# Altium PCB STM32F302VC_EVM.PcbDoc (part 14 of 19)
Units mil, origin at the board's own origin, x right, y up, seen from the top; angles counter-clockwise.
Board outline 3937.01 x 3937.01 mil, 2 copper layers (Top Layer, Bottom Layer); 117 components, 166 nets, 602 pads, 373 vias.
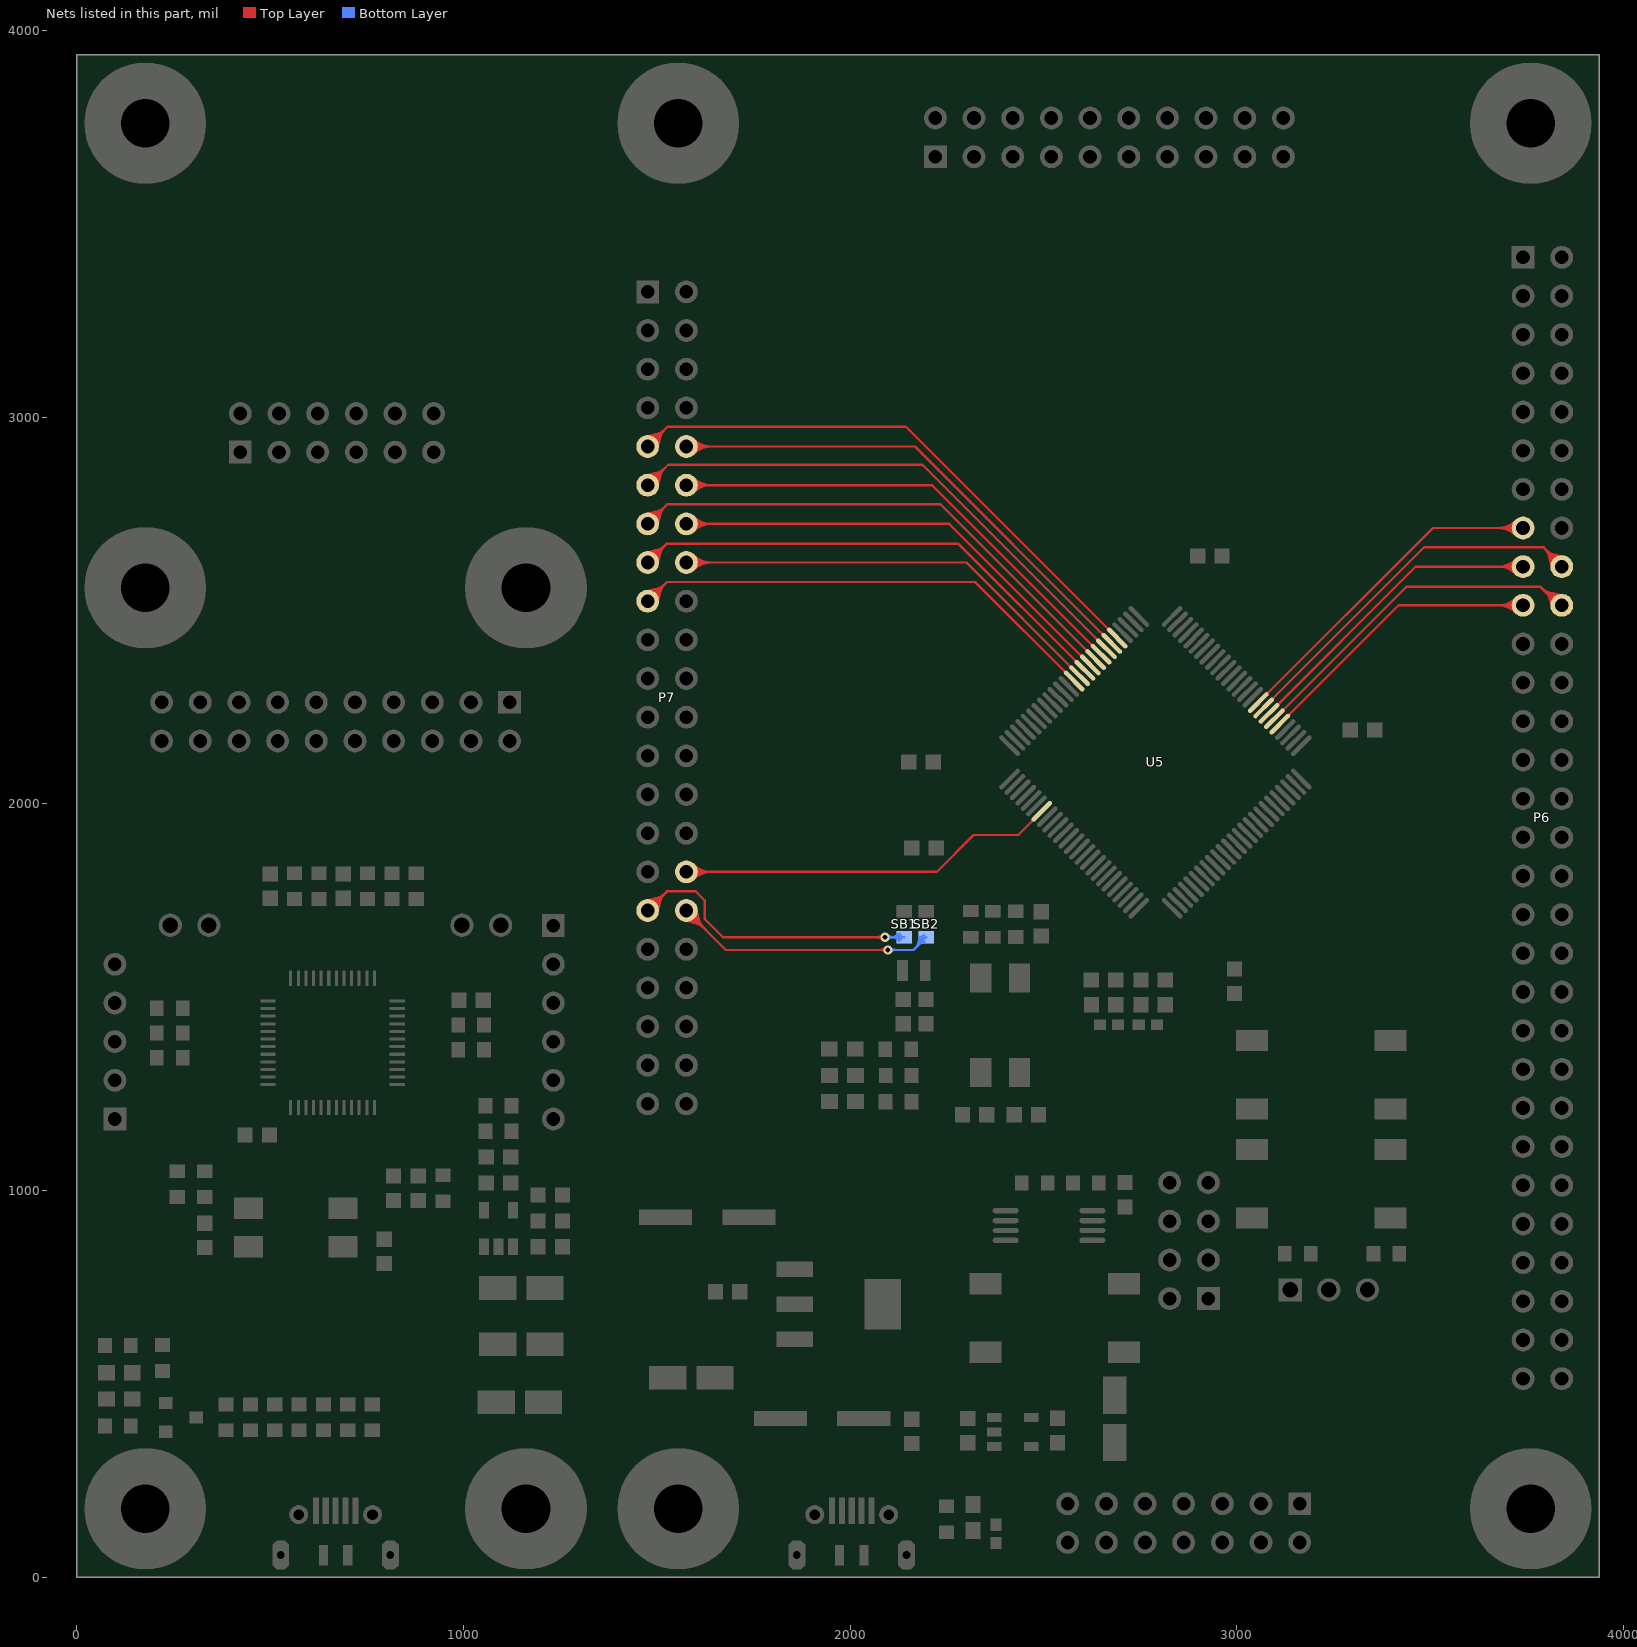
[diagram p14: the nets of this part, all layers, seen from the top]

## Via types
v1: diameter 23.62, hole 11.81, Top Layer to Bottom Layer, tented both sides, 372 vias
v2: diameter 50, hole 28, Top Layer to Bottom Layer, tented both sides, 1 vias

## Nets (pads, with @x,y where several pads share a name; then routed paths per layer and width w, separated by ;. In a path a pad name is that pad's centre, name@x,y a point inside that pad or via, vN(x,y) a via of type N, cw(c..) or ccw(c..) an arc to the next point about the centre after c; other vN are vias at no path point) (continued)
PC12: P7.9 U5.80 | length 3401.5
  Top Layer w6: P7.9@1476.38,2924.02 1527.76,2975.39 2143.97,2975.39 U5.80@2690.54,2428.82 ; P7.9@1461.22,2927.12 cw(c1494.37,2920.33) 1485.61,2953.02 ; P7.9@1461.22,2927.12 cw(c1494.37,2920.33) 1485.61,2953.02 ; P7.9@1461.22,2927.12 cw(c1494.37,2920.33) 1485.61,2953.02 ; P7.9@1467.1,2925.92 cw(c1505.01,2918.15) 1494.99,2955.53 ; P7.9@1467.1,2925.92 cw(c1505.01,2918.15) 1494.99,2955.53 ; P7.9@1467.1,2925.92 cw(c1505.01,2918.15) 1494.99,2955.53 ; P7.9@1472.92,2924.27 cw(c1500.72,2922.2) 1493.5,2949.13 ; P7.9@1472.92,2924.27 cw(c1500.72,2922.2) 1493.5,2949.13 ; P7.9@1472.92,2924.27 cw(c1500.72,2922.2) 1493.5,2949.13 ; P7.9@1472.98,2924.71 cw(c1515.64,2915.98) 1504.37,2958.04 ; P7.9@1472.98,2924.71 cw(c1515.64,2915.98) 1504.37,2958.04 ; P7.9@1472.98,2924.71 cw(c1515.64,2915.98) 1504.37,2958.04 ; P7.9@1476.19,2926.54 ccw(c1473.9,2957.29) 1503.68,2949.31 ; P7.9@1476.19,2926.54 ccw(c1473.9,2957.29) 1503.68,2949.31 ; P7.9@1476.19,2926.54 ccw(c1473.9,2957.29) 1503.68,2949.31 ; P7.9@1476.38,2938.54 ccw(c1476.38,2973.62) 1501.18,2948.82 ; P7.9@1476.38,2938.54 ccw(c1476.38,2973.62) 1501.18,2948.82 ; P7.9@1476.38,2938.54 ccw(c1476.38,2973.62) 1501.18,2948.82 ; P7.9@1476.38,2944.54 ccw(c1476.38,2994.1) 1511.42,2959.06 ; P7.9@1476.38,2944.54 ccw(c1476.38,2994.1) 1511.42,2959.06 ; P7.9@1476.38,2944.54 ccw(c1476.38,2994.1) 1511.42,2959.06 ; P7.9@1476.38,2950.54 ccw(c1476.38,3014.59) 1521.66,2969.3 ; P7.9@1476.38,2950.54 ccw(c1476.38,3014.59) 1521.66,2969.3 ; P7.9@1476.38,2950.54 ccw(c1476.38,3014.59) 1521.66,2969.3 ; P7.9@1476.64,2920.55 ccw(c1474.56,2948.36) 1501.49,2941.14 ; P7.9@1476.64,2920.55 ccw(c1474.56,2948.36) 1501.49,2941.14 ; P7.9@1476.64,2920.55 ccw(c1474.56,2948.36) 1501.49,2941.14 ; P7.9@1477.07,2920.61 ccw(c1468.34,2963.28) 1510.41,2952.01 ; P7.9@1477.07,2920.61 ccw(c1468.34,2963.28) 1510.41,2952.01 ; P7.9@1477.07,2920.61 ccw(c1468.34,2963.28) 1510.41,2952.01 ; P7.9@1478.28,2914.74 ccw(c1470.52,2952.65) 1507.89,2942.63 ; P7.9@1478.28,2914.74 ccw(c1470.52,2952.65) 1507.89,2942.63 ; P7.9@1478.28,2914.74 ccw(c1470.52,2952.65) 1507.89,2942.63 ; P7.9@1478.9,2923.83 cw(c1509.65,2921.53) 1501.67,2951.32 ; P7.9@1478.9,2923.83 cw(c1509.65,2921.53) 1501.67,2951.32 ; P7.9@1478.9,2923.83 cw(c1509.65,2921.53) 1501.67,2951.32 ; P7.9@1479.48,2908.86 ccw(c1472.69,2942.01) 1505.38,2933.25 ; P7.9@1479.48,2908.86 ccw(c1472.69,2942.01) 1505.38,2933.25 ; P7.9@1479.48,2908.86 ccw(c1472.69,2942.01) 1505.38,2933.25 ; P7.9@1490.91,2924.02 cw(c1525.98,2924.02) 1501.18,2948.82 ; P7.9@1490.91,2924.02 cw(c1525.98,2924.02) 1501.18,2948.82 ; P7.9@1490.91,2924.02 cw(c1525.98,2924.02) 1501.18,2948.82 ; P7.9@1496.91,2924.02 cw(c1546.46,2924.02) 1511.42,2959.06 ; P7.9@1496.91,2924.02 cw(c1546.46,2924.02) 1511.42,2959.06 ; P7.9@1496.91,2924.02 cw(c1546.46,2924.02) 1511.42,2959.06 ; P7.9@1502.91,2924.02 cw(c1566.95,2924.02) 1521.66,2969.3 ; P7.9@1502.91,2924.02 cw(c1566.95,2924.02) 1521.66,2969.3 ; P7.9@1502.91,2924.02 cw(c1566.95,2924.02) 1521.66,2969.3 ; 2664.7,2454.66 cw(c2659.74,2449.7) U5.80@2666.76,2449.7 ; 2664.7,2454.66 ccw(c2669.66,2459.62) U5.80@2669.66,2452.61 ; 2664.7,2454.66 ccw(c2669.66,2459.62) U5.80@2669.66,2452.61 ; 2664.7,2454.66 cw(c2659.74,2449.7) U5.80@2666.76,2449.7 ; 2664.7,2454.66 ccw(c2669.66,2459.62) U5.80@2669.66,2452.61 ; 2664.7,2454.66 cw(c2659.74,2449.7) U5.80@2666.76,2449.7
PC13: P7.32 U5.7 | length 1717.8
  Top Layer w6: P7.32@1576.38,1824.02 2223.81,1824.02 2319.09,1919.29 2434.34,1919.29 U5.7@2495.67,1980.62 ; P7.32@1586.65,1813.74 cw(c1611.45,1788.94) 1611.45,1824.02 ; P7.32@1586.65,1813.74 cw(c1611.45,1788.94) 1611.45,1824.02 ; P7.32@1586.65,1813.74 cw(c1611.45,1788.94) 1611.45,1824.02 ; P7.32@1586.65,1834.29 ccw(c1611.45,1859.09) 1611.45,1824.02 ; P7.32@1586.65,1834.29 ccw(c1611.45,1859.09) 1611.45,1824.02 ; P7.32@1586.65,1834.29 ccw(c1611.45,1859.09) 1611.45,1824.02 ; P7.32@1590.89,1809.5 cw(c1625.93,1774.46) 1625.93,1824.02 ; P7.32@1590.89,1809.5 cw(c1625.93,1774.46) 1625.93,1824.02 ; P7.32@1590.89,1809.5 cw(c1625.93,1774.46) 1625.93,1824.02 ; P7.32@1590.89,1838.53 ccw(c1625.94,1873.57) 1625.94,1824.02 ; P7.32@1590.89,1838.53 ccw(c1625.94,1873.57) 1625.94,1824.02 ; P7.32@1590.89,1838.53 ccw(c1625.94,1873.57) 1625.94,1824.02 ; P7.32@1595.14,1805.26 cw(c1640.42,1759.97) 1640.42,1824.02 ; P7.32@1595.14,1805.26 cw(c1640.42,1759.97) 1640.42,1824.02 ; P7.32@1595.14,1805.26 cw(c1640.42,1759.97) 1640.42,1824.02 ; P7.32@1595.14,1842.77 ccw(c1640.42,1888.06) 1640.42,1824.02 ; P7.32@1595.14,1842.77 ccw(c1640.42,1888.06) 1640.42,1824.02 ; P7.32@1595.14,1842.77 ccw(c1640.42,1888.06) 1640.42,1824.02 ; 2469.83,1954.78 cw(c2474.79,1949.82) U5.7@2474.79,1956.83 ; 2469.83,1954.78 ccw(c2464.87,1959.74) U5.7@2471.89,1959.74 ; 2469.83,1954.78 ccw(c2464.87,1959.74) U5.7@2471.89,1959.74 ; 2469.83,1954.78 cw(c2474.79,1949.82) U5.7@2474.79,1956.83 ; 2469.83,1954.78 ccw(c2464.87,1959.74) U5.7@2471.89,1959.74 ; 2469.83,1954.78 cw(c2474.79,1949.82) U5.7@2474.79,1956.83
PC14: P7.33 SB1.1 | length 3095.8
  Top Layer w6: P7.33@1476.38,1724.02 1525.98,1773.62 1600.69,1773.62 1624.02,1750.3 1624.02,1702.19 1671.12,1655.09 v1(2089.99,1655.09) ; P7.33@1461.22,1727.12 cw(c1494.37,1720.33) 1485.61,1753.02 ; P7.33@1461.22,1727.12 cw(c1494.37,1720.33) 1485.61,1753.02 ; P7.33@1461.22,1727.12 cw(c1494.37,1720.33) 1485.61,1753.02 ; P7.33@1467.1,1725.92 cw(c1505.01,1718.15) 1494.99,1755.53 ; P7.33@1467.1,1725.92 cw(c1505.01,1718.15) 1494.99,1755.53 ; P7.33@1467.1,1725.92 cw(c1505.01,1718.15) 1494.99,1755.53 ; P7.33@1472.92,1724.27 cw(c1500.72,1722.2) 1493.5,1749.13 ; P7.33@1472.92,1724.27 cw(c1500.72,1722.2) 1493.5,1749.13 ; P7.33@1472.92,1724.27 cw(c1500.72,1722.2) 1493.5,1749.13 ; P7.33@1472.98,1724.71 cw(c1515.64,1715.98) 1504.37,1758.04 ; P7.33@1472.98,1724.71 cw(c1515.64,1715.98) 1504.37,1758.04 ; P7.33@1472.98,1724.71 cw(c1515.64,1715.98) 1504.37,1758.04 ; P7.33@1476.19,1726.54 ccw(c1473.9,1757.29) 1503.68,1749.31 ; P7.33@1476.19,1726.54 ccw(c1473.9,1757.29) 1503.68,1749.31 ; P7.33@1476.19,1726.54 ccw(c1473.9,1757.29) 1503.68,1749.31 ; P7.33@1476.38,1738.54 ccw(c1476.38,1773.62) 1501.18,1748.82 ; P7.33@1476.38,1738.54 ccw(c1476.38,1773.62) 1501.18,1748.82 ; P7.33@1476.38,1738.54 ccw(c1476.38,1773.62) 1501.18,1748.82 ; P7.33@1476.38,1744.54 ccw(c1476.38,1794.1) 1511.42,1759.06 ; P7.33@1476.38,1744.54 ccw(c1476.38,1794.1) 1511.42,1759.06 ; P7.33@1476.38,1744.54 ccw(c1476.38,1794.1) 1511.42,1759.06 ; P7.33@1476.38,1750.54 ccw(c1476.38,1814.59) 1521.66,1769.3 ; P7.33@1476.38,1750.54 ccw(c1476.38,1814.59) 1521.66,1769.3 ; P7.33@1476.38,1750.54 ccw(c1476.38,1814.59) 1521.66,1769.3 ; P7.33@1476.64,1720.55 ccw(c1474.56,1748.36) 1501.49,1741.14 ; P7.33@1476.64,1720.55 ccw(c1474.56,1748.36) 1501.49,1741.14 ; P7.33@1476.64,1720.55 ccw(c1474.56,1748.36) 1501.49,1741.14 ; P7.33@1477.07,1720.61 ccw(c1468.34,1763.28) 1510.41,1752.01 ; P7.33@1477.07,1720.61 ccw(c1468.34,1763.28) 1510.41,1752.01 ; P7.33@1477.07,1720.61 ccw(c1468.34,1763.28) 1510.41,1752.01 ; P7.33@1478.28,1714.74 ccw(c1470.52,1752.65) 1507.89,1742.63 ; P7.33@1478.28,1714.74 ccw(c1470.52,1752.65) 1507.89,1742.63 ; P7.33@1478.28,1714.74 ccw(c1470.52,1752.65) 1507.89,1742.63 ; P7.33@1478.9,1723.83 cw(c1509.65,1721.53) 1501.67,1751.32 ; P7.33@1478.9,1723.83 cw(c1509.65,1721.53) 1501.67,1751.32 ; P7.33@1478.9,1723.83 cw(c1509.65,1721.53) 1501.67,1751.32 ; P7.33@1479.48,1708.86 ccw(c1472.69,1742.01) 1505.38,1733.25 ; P7.33@1479.48,1708.86 ccw(c1472.69,1742.01) 1505.38,1733.25 ; P7.33@1479.48,1708.86 ccw(c1472.69,1742.01) 1505.38,1733.25 ; P7.33@1490.91,1724.02 cw(c1525.98,1724.02) 1501.18,1748.82 ; P7.33@1490.91,1724.02 cw(c1525.98,1724.02) 1501.18,1748.82 ; P7.33@1490.91,1724.02 cw(c1525.98,1724.02) 1501.18,1748.82 ; P7.33@1496.91,1724.02 cw(c1546.46,1724.02) 1511.42,1759.06 ; P7.33@1496.91,1724.02 cw(c1546.46,1724.02) 1511.42,1759.06 ; P7.33@1496.91,1724.02 cw(c1546.46,1724.02) 1511.42,1759.06 ; P7.33@1502.91,1724.02 cw(c1566.95,1724.02) 1521.66,1769.3 ; P7.33@1502.91,1724.02 cw(c1566.95,1724.02) 1521.66,1769.3 ; P7.33@1502.91,1724.02 cw(c1566.95,1724.02) 1521.66,1769.3 ; 2068.72,1655.09 cw(c2068.72,1633.82) v1@2083.76,1648.86 ; 2068.72,1655.09 ccw(c2068.72,1676.36) v1@2083.76,1661.32 ; 2068.72,1655.09 ccw(c2068.72,1676.36) v1@2083.76,1661.32 ; 2068.72,1655.09 cw(c2068.72,1633.82) v1@2083.76,1648.86 ; 2068.72,1655.09 ccw(c2068.72,1676.36) v1@2083.76,1661.32 ; 2068.72,1655.09 cw(c2068.72,1633.82) v1@2083.76,1648.86
  Bottom Layer w6: v1(2089.99,1655.09) SB1.1@2139.76,1655.09 ; v1@2096.22,1648.86 cw(c2111.26,1633.82) 2111.26,1655.09 ; v1@2096.22,1648.86 cw(c2111.26,1633.82) 2111.26,1655.09 ; v1@2096.22,1648.86 cw(c2111.26,1633.82) 2111.26,1655.09 ; v1@2096.22,1661.32 ccw(c2111.26,1676.36) 2111.26,1655.09 ; v1@2096.22,1661.32 ccw(c2111.26,1676.36) 2111.26,1655.09 ; v1@2096.22,1661.32 ccw(c2111.26,1676.36) 2111.26,1655.09 ; 2104.38,1655.09 cw(c2104.38,1623.7) SB1.1@2126.57,1645.9 ; 2104.38,1655.09 ccw(c2104.38,1686.47) SB1.1@2126.57,1664.28 ; 2104.38,1655.09 ccw(c2104.38,1686.47) SB1.1@2126.57,1664.28 ; 2104.38,1655.09 cw(c2104.38,1623.7) SB1.1@2126.57,1645.9 ; 2104.38,1655.09 ccw(c2104.38,1686.47) SB1.1@2126.57,1664.28 ; 2104.38,1655.09 cw(c2104.38,1623.7) SB1.1@2126.57,1645.9 ; 2118.86,1655.09 cw(c2118.86,1638.19) SB1.1@2130.81,1650.14 ; 2118.86,1655.09 ccw(c2118.86,1671.99) SB1.1@2130.81,1660.04 ; 2118.86,1655.09 ccw(c2118.86,1671.99) SB1.1@2130.81,1660.04 ; 2118.86,1655.09 cw(c2118.86,1638.19) SB1.1@2130.81,1650.14 ; 2118.86,1655.09 ccw(c2118.86,1671.99) SB1.1@2130.81,1660.04 ; 2118.86,1655.09 cw(c2118.86,1638.19) SB1.1@2130.81,1650.14
PC15: P7.34 SB2.1 | length 3143
  Top Layer w6: P7.34@1576.38,1724.02 1678.35,1622.05 v1(2097.44,1622.05) ; P7.34@1561.22,1720.91 ccw(c1594.37,1727.7) 1585.61,1695.01 ; P7.34@1561.22,1720.91 ccw(c1594.37,1727.7) 1585.61,1695.01 ; P7.34@1561.22,1720.91 ccw(c1594.37,1727.7) 1585.61,1695.01 ; P7.34@1567.1,1722.12 ccw(c1605.01,1729.88) 1594.99,1692.5 ; P7.34@1567.1,1722.12 ccw(c1605.01,1729.88) 1594.99,1692.5 ; P7.34@1567.1,1722.12 ccw(c1605.01,1729.88) 1594.99,1692.5 ; P7.34@1572.92,1723.76 ccw(c1600.72,1725.83) 1593.5,1698.9 ; P7.34@1572.92,1723.76 ccw(c1600.72,1725.83) 1593.5,1698.9 ; P7.34@1572.92,1723.76 ccw(c1600.72,1725.83) 1593.5,1698.9 ; P7.34@1572.98,1723.32 ccw(c1615.64,1732.06) 1604.37,1689.99 ; P7.34@1572.98,1723.32 ccw(c1615.64,1732.06) 1604.37,1689.99 ; P7.34@1572.98,1723.32 ccw(c1615.64,1732.06) 1604.37,1689.99 ; P7.34@1576.19,1721.5 cw(c1573.9,1690.74) 1603.68,1698.73 ; P7.34@1576.19,1721.5 cw(c1573.9,1690.74) 1603.68,1698.73 ; P7.34@1576.19,1721.5 cw(c1573.9,1690.74) 1603.68,1698.73 ; P7.34@1576.38,1697.49 cw(c1576.38,1633.45) 1621.66,1678.73 ; P7.34@1576.38,1697.49 cw(c1576.38,1633.45) 1621.66,1678.73 ; P7.34@1576.38,1697.49 cw(c1576.38,1633.45) 1621.66,1678.73 ; P7.34@1576.38,1703.49 cw(c1576.38,1653.93) 1611.42,1688.97 ; P7.34@1576.38,1703.49 cw(c1576.38,1653.93) 1611.42,1688.97 ; P7.34@1576.38,1703.49 cw(c1576.38,1653.93) 1611.42,1688.97 ; P7.34@1576.38,1709.49 cw(c1576.38,1674.42) 1601.18,1699.22 ; P7.34@1576.38,1709.49 cw(c1576.38,1674.42) 1601.18,1699.22 ; P7.34@1576.38,1709.49 cw(c1576.38,1674.42) 1601.18,1699.22 ; P7.34@1576.64,1727.48 cw(c1574.56,1699.67) 1601.49,1706.89 ; P7.34@1576.64,1727.48 cw(c1574.56,1699.67) 1601.49,1706.89 ; P7.34@1576.64,1727.48 cw(c1574.56,1699.67) 1601.49,1706.89 ; P7.34@1577.07,1727.42 cw(c1568.34,1684.75) 1610.41,1696.02 ; P7.34@1577.07,1727.42 cw(c1568.34,1684.75) 1610.41,1696.02 ; P7.34@1577.07,1727.42 cw(c1568.34,1684.75) 1610.41,1696.02 ; P7.34@1578.28,1733.3 cw(c1570.52,1695.39) 1607.89,1705.4 ; P7.34@1578.28,1733.3 cw(c1570.52,1695.39) 1607.89,1705.4 ; P7.34@1578.28,1733.3 cw(c1570.52,1695.39) 1607.89,1705.4 ; P7.34@1578.9,1724.2 ccw(c1609.65,1726.5) 1601.67,1696.71 ; P7.34@1578.9,1724.2 ccw(c1609.65,1726.5) 1601.67,1696.71 ; P7.34@1578.9,1724.2 ccw(c1609.65,1726.5) 1601.67,1696.71 ; P7.34@1579.48,1739.17 cw(c1572.69,1706.02) 1605.38,1714.78 ; P7.34@1579.48,1739.17 cw(c1572.69,1706.02) 1605.38,1714.78 ; P7.34@1579.48,1739.17 cw(c1572.69,1706.02) 1605.38,1714.78 ; P7.34@1590.91,1724.02 ccw(c1625.98,1724.02) 1601.18,1699.22 ; P7.34@1590.91,1724.02 ccw(c1625.98,1724.02) 1601.18,1699.22 ; P7.34@1590.91,1724.02 ccw(c1625.98,1724.02) 1601.18,1699.22 ; P7.34@1596.91,1724.02 ccw(c1646.46,1724.02) 1611.42,1688.97 ; P7.34@1596.91,1724.02 ccw(c1646.46,1724.02) 1611.42,1688.97 ; P7.34@1596.91,1724.02 ccw(c1646.46,1724.02) 1611.42,1688.97 ; P7.34@1602.91,1724.02 ccw(c1666.95,1724.02) 1621.66,1678.73 ; P7.34@1602.91,1724.02 ccw(c1666.95,1724.02) 1621.66,1678.73 ; P7.34@1602.91,1724.02 ccw(c1666.95,1724.02) 1621.66,1678.73 ; 2076.17,1622.05 cw(c2076.17,1600.78) v1@2091.21,1615.82 ; 2076.17,1622.05 ccw(c2076.17,1643.32) v1@2091.21,1628.28 ; 2076.17,1622.05 ccw(c2076.17,1643.32) v1@2091.21,1628.28 ; 2076.17,1622.05 cw(c2076.17,1600.78) v1@2091.21,1615.82 ; 2076.17,1622.05 ccw(c2076.17,1643.32) v1@2091.21,1628.28 ; 2076.17,1622.05 cw(c2076.17,1600.78) v1@2091.21,1615.82
  Bottom Layer w6: v1(2097.44,1622.05) 2163.81,1622.05 SB2.1@2196.85,1655.09 ; v1@2103.67,1615.82 cw(c2118.71,1600.78) 2118.71,1622.05 ; v1@2103.67,1615.82 cw(c2118.71,1600.78) 2118.71,1622.05 ; v1@2103.67,1615.82 cw(c2118.71,1600.78) 2118.71,1622.05 ; v1@2103.67,1628.28 ccw(c2118.71,1643.32) 2118.71,1622.05 ; v1@2103.67,1628.28 ccw(c2118.71,1643.32) 2118.71,1622.05 ; v1@2103.67,1628.28 ccw(c2118.71,1643.32) 2118.71,1622.05 ; 2167.83,1626.07 ccw(c2138.81,1655.09) SB2.1@2179.85,1655.09 ; 2167.83,1626.07 ccw(c2138.81,1655.09) SB2.1@2179.85,1655.09 ; 2167.83,1626.07 ccw(c2138.81,1655.09) SB2.1@2179.85,1655.09 ; 2174.36,1634.59 cw(c2201.48,1627.32) SB2.1@2193.15,1654.13 ; 2174.36,1634.59 cw(c2201.48,1627.32) SB2.1@2193.15,1654.13 ; 2174.36,1634.59 cw(c2201.48,1627.32) SB2.1@2193.15,1654.13 ; SB2.1@2177.17,1645.1 cw(c2197.66,1639.61) SB2.1@2191.37,1659.86 ; SB2.1@2177.17,1645.1 cw(c2197.66,1639.61) SB2.1@2191.37,1659.86 ; SB2.1@2177.17,1645.1 cw(c2197.66,1639.61) SB2.1@2191.37,1659.86 ; 2177.49,1635.72 cw(c2192.85,1620.36) SB2.1@2192.85,1642.09 ; 2177.49,1635.72 cw(c2192.85,1620.36) SB2.1@2192.85,1642.09 ; 2177.49,1635.72 cw(c2192.85,1620.36) SB2.1@2192.85,1642.09 ; 2178.07,1636.31 ccw(c2159.29,1655.09) SB2.1@2185.85,1655.09 ; 2178.07,1636.31 ccw(c2159.29,1655.09) SB2.1@2185.85,1655.09 ; 2178.07,1636.31 ccw(c2159.29,1655.09) SB2.1@2185.85,1655.09
PD0: P7.10 U5.81 | length 2044.8
  Top Layer w6: P7.10@1576.38,2924.02 2167.51,2924.02 U5.81@2676.62,2414.9 ; P7.10@1586.65,2913.74 cw(c1611.45,2888.94) 1611.45,2924.02 ; P7.10@1586.65,2913.74 cw(c1611.45,2888.94) 1611.45,2924.02 ; P7.10@1586.65,2913.74 cw(c1611.45,2888.94) 1611.45,2924.02 ; P7.10@1586.65,2934.29 ccw(c1611.45,2959.09) 1611.45,2924.02 ; P7.10@1586.65,2934.29 ccw(c1611.45,2959.09) 1611.45,2924.02 ; P7.10@1586.65,2934.29 ccw(c1611.45,2959.09) 1611.45,2924.02 ; P7.10@1590.89,2909.5 cw(c1625.93,2874.46) 1625.93,2924.02 ; P7.10@1590.89,2909.5 cw(c1625.93,2874.46) 1625.93,2924.02 ; P7.10@1590.89,2909.5 cw(c1625.93,2874.46) 1625.93,2924.02 ; P7.10@1590.89,2938.53 ccw(c1625.94,2973.57) 1625.94,2924.02 ; P7.10@1590.89,2938.53 ccw(c1625.94,2973.57) 1625.94,2924.02 ; P7.10@1590.89,2938.53 ccw(c1625.94,2973.57) 1625.94,2924.02 ; P7.10@1595.14,2905.26 cw(c1640.42,2859.97) 1640.42,2924.02 ; P7.10@1595.14,2905.26 cw(c1640.42,2859.97) 1640.42,2924.02 ; P7.10@1595.14,2905.26 cw(c1640.42,2859.97) 1640.42,2924.02 ; P7.10@1595.14,2942.77 ccw(c1640.42,2988.06) 1640.42,2924.02 ; P7.10@1595.14,2942.77 ccw(c1640.42,2988.06) 1640.42,2924.02 ; P7.10@1595.14,2942.77 ccw(c1640.42,2988.06) 1640.42,2924.02 ; 2650.78,2440.74 cw(c2645.82,2435.78) U5.81@2652.84,2435.78 ; 2650.78,2440.74 ccw(c2655.74,2445.7) U5.81@2655.74,2438.69 ; 2650.78,2440.74 ccw(c2655.74,2445.7) U5.81@2655.74,2438.69 ; 2650.78,2440.74 cw(c2645.82,2435.78) U5.81@2652.84,2435.78 ; 2650.78,2440.74 ccw(c2655.74,2445.7) U5.81@2655.74,2438.69 ; 2650.78,2440.74 cw(c2645.82,2435.78) U5.81@2652.84,2435.78
PD1: P7.11 U5.82 | length 3345.1
  Top Layer w6: P7.11@1476.38,2824.02 1529.33,2876.97 2186.72,2876.97 U5.82@2662.7,2400.98 ; P7.11@1461.22,2827.12 cw(c1494.37,2820.33) 1485.61,2853.02 ; P7.11@1461.22,2827.12 cw(c1494.37,2820.33) 1485.61,2853.02 ; P7.11@1461.22,2827.12 cw(c1494.37,2820.33) 1485.61,2853.02 ; P7.11@1467.1,2825.92 cw(c1505.01,2818.15) 1494.99,2855.53 ; P7.11@1467.1,2825.92 cw(c1505.01,2818.15) 1494.99,2855.53 ; P7.11@1467.1,2825.92 cw(c1505.01,2818.15) 1494.99,2855.53 ; P7.11@1472.92,2824.27 cw(c1500.72,2822.2) 1493.5,2849.13 ; P7.11@1472.92,2824.27 cw(c1500.72,2822.2) 1493.5,2849.13 ; P7.11@1472.92,2824.27 cw(c1500.72,2822.2) 1493.5,2849.13 ; P7.11@1472.98,2824.71 cw(c1515.64,2815.98) 1504.37,2858.04 ; P7.11@1472.98,2824.71 cw(c1515.64,2815.98) 1504.37,2858.04 ; P7.11@1472.98,2824.71 cw(c1515.64,2815.98) 1504.37,2858.04 ; P7.11@1476.19,2826.54 ccw(c1473.9,2857.29) 1503.68,2849.31 ; P7.11@1476.19,2826.54 ccw(c1473.9,2857.29) 1503.68,2849.31 ; P7.11@1476.19,2826.54 ccw(c1473.9,2857.29) 1503.68,2849.31 ; P7.11@1476.38,2838.54 ccw(c1476.38,2873.62) 1501.18,2848.82 ; P7.11@1476.38,2838.54 ccw(c1476.38,2873.62) 1501.18,2848.82 ; P7.11@1476.38,2838.54 ccw(c1476.38,2873.62) 1501.18,2848.82 ; P7.11@1476.38,2844.54 ccw(c1476.38,2894.1) 1511.42,2859.06 ; P7.11@1476.38,2844.54 ccw(c1476.38,2894.1) 1511.42,2859.06 ; P7.11@1476.38,2844.54 ccw(c1476.38,2894.1) 1511.42,2859.06 ; P7.11@1476.38,2850.54 ccw(c1476.38,2914.59) 1521.66,2869.3 ; P7.11@1476.38,2850.54 ccw(c1476.38,2914.59) 1521.66,2869.3 ; P7.11@1476.38,2850.54 ccw(c1476.38,2914.59) 1521.66,2869.3 ; P7.11@1476.64,2820.55 ccw(c1474.56,2848.36) 1501.49,2841.14 ; P7.11@1476.64,2820.55 ccw(c1474.56,2848.36) 1501.49,2841.14 ; P7.11@1476.64,2820.55 ccw(c1474.56,2848.36) 1501.49,2841.14 ; P7.11@1477.07,2820.61 ccw(c1468.34,2863.28) 1510.41,2852.01 ; P7.11@1477.07,2820.61 ccw(c1468.34,2863.28) 1510.41,2852.01 ; P7.11@1477.07,2820.61 ccw(c1468.34,2863.28) 1510.41,2852.01 ; P7.11@1478.28,2814.74 ccw(c1470.52,2852.65) 1507.89,2842.63 ; P7.11@1478.28,2814.74 ccw(c1470.52,2852.65) 1507.89,2842.63 ; P7.11@1478.28,2814.74 ccw(c1470.52,2852.65) 1507.89,2842.63 ; P7.11@1478.9,2823.83 cw(c1509.65,2821.53) 1501.67,2851.32 ; P7.11@1478.9,2823.83 cw(c1509.65,2821.53) 1501.67,2851.32 ; P7.11@1478.9,2823.83 cw(c1509.65,2821.53) 1501.67,2851.32 ; P7.11@1479.48,2808.86 ccw(c1472.69,2842.01) 1505.38,2833.25 ; P7.11@1479.48,2808.86 ccw(c1472.69,2842.01) 1505.38,2833.25 ; P7.11@1479.48,2808.86 ccw(c1472.69,2842.01) 1505.38,2833.25 ; P7.11@1490.91,2824.02 cw(c1525.98,2824.02) 1501.18,2848.82 ; P7.11@1490.91,2824.02 cw(c1525.98,2824.02) 1501.18,2848.82 ; P7.11@1490.91,2824.02 cw(c1525.98,2824.02) 1501.18,2848.82 ; P7.11@1496.91,2824.02 cw(c1546.46,2824.02) 1511.42,2859.06 ; P7.11@1496.91,2824.02 cw(c1546.46,2824.02) 1511.42,2859.06 ; P7.11@1496.91,2824.02 cw(c1546.46,2824.02) 1511.42,2859.06 ; P7.11@1502.91,2824.02 cw(c1566.95,2824.02) 1521.66,2869.3 ; P7.11@1502.91,2824.02 cw(c1566.95,2824.02) 1521.66,2869.3 ; P7.11@1502.91,2824.02 cw(c1566.95,2824.02) 1521.66,2869.3 ; 2636.86,2426.82 cw(c2631.9,2421.86) U5.82@2638.92,2421.86 ; 2636.86,2426.82 ccw(c2641.82,2431.78) U5.82@2641.82,2424.77 ; 2636.86,2426.82 ccw(c2641.82,2431.78) U5.82@2641.82,2424.77 ; 2636.86,2426.82 cw(c2631.9,2421.86) U5.82@2638.92,2421.86 ; 2636.86,2426.82 ccw(c2641.82,2431.78) U5.82@2641.82,2424.77 ; 2636.86,2426.82 cw(c2631.9,2421.86) U5.82@2638.92,2421.86
PD2: P7.12 U5.83 | length 1987.1
  Top Layer w6: P7.12@1576.38,2824.02 2211.83,2824.02 U5.83@2648.78,2387.06 ; P7.12@1586.65,2813.74 cw(c1611.45,2788.94) 1611.45,2824.02 ; P7.12@1586.65,2813.74 cw(c1611.45,2788.94) 1611.45,2824.02 ; P7.12@1586.65,2813.74 cw(c1611.45,2788.94) 1611.45,2824.02 ; P7.12@1586.65,2834.29 ccw(c1611.45,2859.09) 1611.45,2824.02 ; P7.12@1586.65,2834.29 ccw(c1611.45,2859.09) 1611.45,2824.02 ; P7.12@1586.65,2834.29 ccw(c1611.45,2859.09) 1611.45,2824.02 ; P7.12@1590.89,2809.5 cw(c1625.93,2774.46) 1625.93,2824.02 ; P7.12@1590.89,2809.5 cw(c1625.93,2774.46) 1625.93,2824.02 ; P7.12@1590.89,2809.5 cw(c1625.93,2774.46) 1625.93,2824.02 ; P7.12@1590.89,2838.53 ccw(c1625.94,2873.57) 1625.94,2824.02 ; P7.12@1590.89,2838.53 ccw(c1625.94,2873.57) 1625.94,2824.02 ; P7.12@1590.89,2838.53 ccw(c1625.94,2873.57) 1625.94,2824.02 ; P7.12@1595.14,2805.26 cw(c1640.42,2759.97) 1640.42,2824.02 ; P7.12@1595.14,2805.26 cw(c1640.42,2759.97) 1640.42,2824.02 ; P7.12@1595.14,2805.26 cw(c1640.42,2759.97) 1640.42,2824.02 ; P7.12@1595.14,2842.77 ccw(c1640.42,2888.06) 1640.42,2824.02 ; P7.12@1595.14,2842.77 ccw(c1640.42,2888.06) 1640.42,2824.02 ; P7.12@1595.14,2842.77 ccw(c1640.42,2888.06) 1640.42,2824.02 ; 2622.94,2412.9 cw(c2617.98,2407.94) U5.83@2625,2407.94 ; 2622.94,2412.9 ccw(c2627.9,2417.86) U5.83@2627.9,2410.85 ; 2622.94,2412.9 ccw(c2627.9,2417.86) U5.83@2627.9,2410.85 ; 2622.94,2412.9 cw(c2617.98,2407.94) U5.83@2625,2407.94 ; 2622.94,2412.9 ccw(c2627.9,2417.86) U5.83@2627.9,2410.85 ; 2622.94,2412.9 cw(c2617.98,2407.94) U5.83@2625,2407.94
PD3: P7.13 U5.84 | length 3285.4
  Top Layer w6: P7.13@1476.38,2724.02 1526.97,2774.61 2233.4,2774.61 U5.84@2634.86,2373.14 ; P7.13@1461.22,2727.12 cw(c1494.37,2720.33) 1485.61,2753.02 ; P7.13@1461.22,2727.12 cw(c1494.37,2720.33) 1485.61,2753.02 ; P7.13@1461.22,2727.12 cw(c1494.37,2720.33) 1485.61,2753.02 ; P7.13@1467.1,2725.92 cw(c1505.01,2718.15) 1494.99,2755.53 ; P7.13@1467.1,2725.92 cw(c1505.01,2718.15) 1494.99,2755.53 ; P7.13@1467.1,2725.92 cw(c1505.01,2718.15) 1494.99,2755.53 ; P7.13@1472.92,2724.27 cw(c1500.72,2722.2) 1493.5,2749.13 ; P7.13@1472.92,2724.27 cw(c1500.72,2722.2) 1493.5,2749.13 ; P7.13@1472.92,2724.27 cw(c1500.72,2722.2) 1493.5,2749.13 ; P7.13@1472.98,2724.71 cw(c1515.64,2715.98) 1504.37,2758.04 ; P7.13@1472.98,2724.71 cw(c1515.64,2715.98) 1504.37,2758.04 ; P7.13@1472.98,2724.71 cw(c1515.64,2715.98) 1504.37,2758.04 ; P7.13@1476.19,2726.54 ccw(c1473.9,2757.29) 1503.68,2749.31 ; P7.13@1476.19,2726.54 ccw(c1473.9,2757.29) 1503.68,2749.31 ; P7.13@1476.19,2726.54 ccw(c1473.9,2757.29) 1503.68,2749.31 ; P7.13@1476.38,2738.54 ccw(c1476.38,2773.62) 1501.18,2748.82 ; P7.13@1476.38,2738.54 ccw(c1476.38,2773.62) 1501.18,2748.82 ; P7.13@1476.38,2738.54 ccw(c1476.38,2773.62) 1501.18,2748.82 ; P7.13@1476.38,2744.54 ccw(c1476.38,2794.1) 1511.42,2759.06 ; P7.13@1476.38,2744.54 ccw(c1476.38,2794.1) 1511.42,2759.06 ; P7.13@1476.38,2744.54 ccw(c1476.38,2794.1) 1511.42,2759.06 ; P7.13@1476.38,2750.54 ccw(c1476.38,2814.59) 1521.66,2769.3 ; P7.13@1476.38,2750.54 ccw(c1476.38,2814.59) 1521.66,2769.3 ; P7.13@1476.38,2750.54 ccw(c1476.38,2814.59) 1521.66,2769.3 ; P7.13@1476.64,2720.55 ccw(c1474.56,2748.36) 1501.49,2741.14 ; P7.13@1476.64,2720.55 ccw(c1474.56,2748.36) 1501.49,2741.14 ; P7.13@1476.64,2720.55 ccw(c1474.56,2748.36) 1501.49,2741.14 ; P7.13@1477.07,2720.61 ccw(c1468.34,2763.28) 1510.41,2752.01 ; P7.13@1477.07,2720.61 ccw(c1468.34,2763.28) 1510.41,2752.01 ; P7.13@1477.07,2720.61 ccw(c1468.34,2763.28) 1510.41,2752.01 ; P7.13@1478.28,2714.74 ccw(c1470.52,2752.65) 1507.89,2742.63 ; P7.13@1478.28,2714.74 ccw(c1470.52,2752.65) 1507.89,2742.63 ; P7.13@1478.28,2714.74 ccw(c1470.52,2752.65) 1507.89,2742.63 ; P7.13@1478.9,2723.83 cw(c1509.65,2721.53) 1501.67,2751.32 ; P7.13@1478.9,2723.83 cw(c1509.65,2721.53) 1501.67,2751.32 ; P7.13@1478.9,2723.83 cw(c1509.65,2721.53) 1501.67,2751.32 ; P7.13@1479.48,2708.86 ccw(c1472.69,2742.01) 1505.38,2733.25 ; P7.13@1479.48,2708.86 ccw(c1472.69,2742.01) 1505.38,2733.25 ; P7.13@1479.48,2708.86 ccw(c1472.69,2742.01) 1505.38,2733.25 ; P7.13@1490.91,2724.02 cw(c1525.98,2724.02) 1501.18,2748.82 ; P7.13@1490.91,2724.02 cw(c1525.98,2724.02) 1501.18,2748.82 ; P7.13@1490.91,2724.02 cw(c1525.98,2724.02) 1501.18,2748.82 ; P7.13@1496.91,2724.02 cw(c1546.46,2724.02) 1511.42,2759.06 ; P7.13@1496.91,2724.02 cw(c1546.46,2724.02) 1511.42,2759.06 ; P7.13@1496.91,2724.02 cw(c1546.46,2724.02) 1511.42,2759.06 ; P7.13@1502.91,2724.02 cw(c1566.95,2724.02) 1521.66,2769.3 ; P7.13@1502.91,2724.02 cw(c1566.95,2724.02) 1521.66,2769.3 ; P7.13@1502.91,2724.02 cw(c1566.95,2724.02) 1521.66,2769.3 ; 2609.03,2398.98 cw(c2604.07,2394.02) U5.84@2611.08,2394.02 ; 2609.03,2398.98 ccw(c2613.99,2403.94) U5.84@2613.99,2396.93 ; 2609.03,2398.98 ccw(c2613.99,2403.94) U5.84@2613.99,2396.93 ; 2609.03,2398.98 cw(c2604.07,2394.02) U5.84@2611.08,2394.02 ; 2609.03,2398.98 ccw(c2613.99,2403.94) U5.84@2613.99,2396.93 ; 2609.03,2398.98 cw(c2604.07,2394.02) U5.84@2611.08,2394.02
PD4: P7.14 U5.85 | length 1929.3
  Top Layer w6: P7.14@1576.38,2724.02 2256.15,2724.02 U5.85@2620.94,2359.22 ; P7.14@1586.65,2713.74 cw(c1611.45,2688.94) 1611.45,2724.02 ; P7.14@1586.65,2713.74 cw(c1611.45,2688.94) 1611.45,2724.02 ; P7.14@1586.65,2713.74 cw(c1611.45,2688.94) 1611.45,2724.02 ; P7.14@1586.65,2734.29 ccw(c1611.45,2759.09) 1611.45,2724.02 ; P7.14@1586.65,2734.29 ccw(c1611.45,2759.09) 1611.45,2724.02 ; P7.14@1586.65,2734.29 ccw(c1611.45,2759.09) 1611.45,2724.02 ; P7.14@1590.89,2709.5 cw(c1625.93,2674.46) 1625.93,2724.02 ; P7.14@1590.89,2709.5 cw(c1625.93,2674.46) 1625.93,2724.02 ; P7.14@1590.89,2709.5 cw(c1625.93,2674.46) 1625.93,2724.02 ; P7.14@1590.89,2738.53 ccw(c1625.94,2773.57) 1625.94,2724.02 ; P7.14@1590.89,2738.53 ccw(c1625.94,2773.57) 1625.94,2724.02 ; P7.14@1590.89,2738.53 ccw(c1625.94,2773.57) 1625.94,2724.02 ; P7.14@1595.14,2705.26 cw(c1640.42,2659.97) 1640.42,2724.02 ; P7.14@1595.14,2705.26 cw(c1640.42,2659.97) 1640.42,2724.02 ; P7.14@1595.14,2705.26 cw(c1640.42,2659.97) 1640.42,2724.02 ; P7.14@1595.14,2742.77 ccw(c1640.42,2788.06) 1640.42,2724.02 ; P7.14@1595.14,2742.77 ccw(c1640.42,2788.06) 1640.42,2724.02 ; P7.14@1595.14,2742.77 ccw(c1640.42,2788.06) 1640.42,2724.02 ; 2595.11,2385.06 cw(c2590.15,2380.1) U5.85@2597.16,2380.1 ; 2595.11,2385.06 ccw(c2600.07,2390.02) U5.85@2600.07,2383.01 ; 2595.11,2385.06 ccw(c2600.07,2390.02) U5.85@2600.07,2383.01 ; 2595.11,2385.06 cw(c2590.15,2380.1) U5.85@2597.16,2380.1 ; 2595.11,2385.06 ccw(c2600.07,2390.02) U5.85@2600.07,2383.01 ; 2595.11,2385.06 cw(c2590.15,2380.1) U5.85@2597.16,2380.1
PD5: P7.15 U5.86 | length 3225.7
  Top Layer w6: P7.15@1476.38,2624.02 1524.61,2672.24 2280.09,2672.24 U5.86@2607.03,2345.31 ; P7.15@1461.22,2627.12 cw(c1494.37,2620.33) 1485.61,2653.02 ; P7.15@1461.22,2627.12 cw(c1494.37,2620.33) 1485.61,2653.02 ; P7.15@1461.22,2627.12 cw(c1494.37,2620.33) 1485.61,2653.02 ; P7.15@1467.1,2625.92 cw(c1505.01,2618.15) 1494.99,2655.53 ; P7.15@1467.1,2625.92 cw(c1505.01,2618.15) 1494.99,2655.53 ; P7.15@1467.1,2625.92 cw(c1505.01,2618.15) 1494.99,2655.53 ; P7.15@1472.92,2624.27 cw(c1500.72,2622.2) 1493.5,2649.13 ; P7.15@1472.92,2624.27 cw(c1500.72,2622.2) 1493.5,2649.13 ; P7.15@1472.92,2624.27 cw(c1500.72,2622.2) 1493.5,2649.13 ; P7.15@1472.98,2624.71 cw(c1515.64,2615.98) 1504.37,2658.04 ; P7.15@1472.98,2624.71 cw(c1515.64,2615.98) 1504.37,2658.04 ; P7.15@1472.98,2624.71 cw(c1515.64,2615.98) 1504.37,2658.04 ; P7.15@1476.19,2626.54 ccw(c1473.9,2657.29) 1503.68,2649.31 ; P7.15@1476.19,2626.54 ccw(c1473.9,2657.29) 1503.68,2649.31 ; P7.15@1476.19,2626.54 ccw(c1473.9,2657.29) 1503.68,2649.31 ; P7.15@1476.38,2638.54 ccw(c1476.38,2673.62) 1501.18,2648.82 ; P7.15@1476.38,2638.54 ccw(c1476.38,2673.62) 1501.18,2648.82 ; P7.15@1476.38,2638.54 ccw(c1476.38,2673.62) 1501.18,2648.82 ; P7.15@1476.38,2644.54 ccw(c1476.38,2694.1) 1511.42,2659.06 ; P7.15@1476.38,2644.54 ccw(c1476.38,2694.1) 1511.42,2659.06 ; P7.15@1476.38,2644.54 ccw(c1476.38,2694.1) 1511.42,2659.06 ; P7.15@1476.38,2650.54 ccw(c1476.38,2714.59) 1521.66,2669.3 ; P7.15@1476.38,2650.54 ccw(c1476.38,2714.59) 1521.66,2669.3 ; P7.15@1476.38,2650.54 ccw(c1476.38,2714.59) 1521.66,2669.3 ; P7.15@1476.64,2620.55 ccw(c1474.56,2648.36) 1501.49,2641.14 ; P7.15@1476.64,2620.55 ccw(c1474.56,2648.36) 1501.49,2641.14 ; P7.15@1476.64,2620.55 ccw(c1474.56,2648.36) 1501.49,2641.14 ; P7.15@1477.07,2620.61 ccw(c1468.34,2663.28) 1510.41,2652.01 ; P7.15@1477.07,2620.61 ccw(c1468.34,2663.28) 1510.41,2652.01 ; P7.15@1477.07,2620.61 ccw(c1468.34,2663.28) 1510.41,2652.01 ; P7.15@1478.28,2614.74 ccw(c1470.52,2652.65) 1507.89,2642.63 ; P7.15@1478.28,2614.74 ccw(c1470.52,2652.65) 1507.89,2642.63 ; P7.15@1478.28,2614.74 ccw(c1470.52,2652.65) 1507.89,2642.63 ; P7.15@1478.9,2623.83 cw(c1509.65,2621.53) 1501.67,2651.32 ; P7.15@1478.9,2623.83 cw(c1509.65,2621.53) 1501.67,2651.32 ; P7.15@1478.9,2623.83 cw(c1509.65,2621.53) 1501.67,2651.32 ; P7.15@1479.48,2608.86 ccw(c1472.69,2642.01) 1505.38,2633.25 ; P7.15@1479.48,2608.86 ccw(c1472.69,2642.01) 1505.38,2633.25 ; P7.15@1479.48,2608.86 ccw(c1472.69,2642.01) 1505.38,2633.25 ; P7.15@1490.91,2624.02 cw(c1525.98,2624.02) 1501.18,2648.82 ; P7.15@1490.91,2624.02 cw(c1525.98,2624.02) 1501.18,2648.82 ; P7.15@1490.91,2624.02 cw(c1525.98,2624.02) 1501.18,2648.82 ; P7.15@1496.91,2624.02 cw(c1546.46,2624.02) 1511.42,2659.06 ; P7.15@1496.91,2624.02 cw(c1546.46,2624.02) 1511.42,2659.06 ; P7.15@1496.91,2624.02 cw(c1546.46,2624.02) 1511.42,2659.06 ; P7.15@1502.91,2624.02 cw(c1566.95,2624.02) 1521.66,2669.3 ; P7.15@1502.91,2624.02 cw(c1566.95,2624.02) 1521.66,2669.3 ; P7.15@1502.91,2624.02 cw(c1566.95,2624.02) 1521.66,2669.3 ; 2581.19,2371.14 cw(c2576.23,2366.18) U5.86@2583.24,2366.18 ; 2581.19,2371.14 ccw(c2586.15,2376.1) U5.86@2586.15,2369.09 ; 2581.19,2371.14 ccw(c2586.15,2376.1) U5.86@2586.15,2369.09 ; 2581.19,2371.14 cw(c2576.23,2366.18) U5.86@2583.24,2366.18 ; 2581.19,2371.14 ccw(c2586.15,2376.1) U5.86@2586.15,2369.09 ; 2581.19,2371.14 cw(c2576.23,2366.18) U5.86@2583.24,2366.18
PD6: P7.16 U5.87 | length 1871.6
  Top Layer w6: P7.16@1576.38,2624.02 2300.48,2624.02 U5.87@2593.11,2331.39 ; P7.16@1586.65,2613.74 cw(c1611.45,2588.94) 1611.45,2624.02 ; P7.16@1586.65,2613.74 cw(c1611.45,2588.94) 1611.45,2624.02 ; P7.16@1586.65,2613.74 cw(c1611.45,2588.94) 1611.45,2624.02 ; P7.16@1586.65,2634.29 ccw(c1611.45,2659.09) 1611.45,2624.02 ; P7.16@1586.65,2634.29 ccw(c1611.45,2659.09) 1611.45,2624.02 ; P7.16@1586.65,2634.29 ccw(c1611.45,2659.09) 1611.45,2624.02 ; P7.16@1590.89,2609.5 cw(c1625.93,2574.46) 1625.93,2624.02 ; P7.16@1590.89,2609.5 cw(c1625.93,2574.46) 1625.93,2624.02 ; P7.16@1590.89,2609.5 cw(c1625.93,2574.46) 1625.93,2624.02 ; P7.16@1590.89,2638.53 ccw(c1625.94,2673.57) 1625.94,2624.02 ; P7.16@1590.89,2638.53 ccw(c1625.94,2673.57) 1625.94,2624.02 ; P7.16@1590.89,2638.53 ccw(c1625.94,2673.57) 1625.94,2624.02 ; P7.16@1595.14,2605.26 cw(c1640.42,2559.97) 1640.42,2624.02 ; P7.16@1595.14,2605.26 cw(c1640.42,2559.97) 1640.42,2624.02 ; P7.16@1595.14,2605.26 cw(c1640.42,2559.97) 1640.42,2624.02 ; P7.16@1595.14,2642.77 ccw(c1640.42,2688.06) 1640.42,2624.02 ; P7.16@1595.14,2642.77 ccw(c1640.42,2688.06) 1640.42,2624.02 ; P7.16@1595.14,2642.77 ccw(c1640.42,2688.06) 1640.42,2624.02 ; 2567.27,2357.23 cw(c2562.31,2352.27) U5.87@2569.32,2352.27 ; 2567.27,2357.23 ccw(c2572.23,2362.19) U5.87@2572.23,2355.17 ; 2567.27,2357.23 ccw(c2572.23,2362.19) U5.87@2572.23,2355.17 ; 2567.27,2357.23 cw(c2562.31,2352.27) U5.87@2569.32,2352.27 ; 2567.27,2357.23 ccw(c2572.23,2362.19) U5.87@2572.23,2355.17 ; 2567.27,2357.23 cw(c2562.31,2352.27) U5.87@2569.32,2352.27
PD7: P7.17 U5.88 | length 3169.3
  Top Layer w6: P7.17@1476.38,2524.02 1526.18,2573.82 2322.83,2573.82 U5.88@2579.19,2317.47 ; P7.17@1461.22,2527.12 cw(c1494.37,2520.33) 1485.61,2553.02 ; P7.17@1461.22,2527.12 cw(c1494.37,2520.33) 1485.61,2553.02 ; P7.17@1461.22,2527.12 cw(c1494.37,2520.33) 1485.61,2553.02 ; P7.17@1467.1,2525.92 cw(c1505.01,2518.15) 1494.99,2555.53 ; P7.17@1467.1,2525.92 cw(c1505.01,2518.15) 1494.99,2555.53 ; P7.17@1467.1,2525.92 cw(c1505.01,2518.15) 1494.99,2555.53 ; P7.17@1472.92,2524.27 cw(c1500.72,2522.2) 1493.5,2549.13 ; P7.17@1472.92,2524.27 cw(c1500.72,2522.2) 1493.5,2549.13 ; P7.17@1472.92,2524.27 cw(c1500.72,2522.2) 1493.5,2549.13 ; P7.17@1472.98,2524.71 cw(c1515.64,2515.98) 1504.37,2558.04 ; P7.17@1472.98,2524.71 cw(c1515.64,2515.98) 1504.37,2558.04 ; P7.17@1472.98,2524.71 cw(c1515.64,2515.98) 1504.37,2558.04 ; P7.17@1476.19,2526.54 ccw(c1473.9,2557.29) 1503.68,2549.31 ; P7.17@1476.19,2526.54 ccw(c1473.9,2557.29) 1503.68,2549.31 ; P7.17@1476.19,2526.54 ccw(c1473.9,2557.29) 1503.68,2549.31 ; P7.17@1476.38,2538.54 ccw(c1476.38,2573.62) 1501.18,2548.82 ; P7.17@1476.38,2538.54 ccw(c1476.38,2573.62) 1501.18,2548.82 ; P7.17@1476.38,2538.54 ccw(c1476.38,2573.62) 1501.18,2548.82 ; P7.17@1476.38,2544.54 ccw(c1476.38,2594.1) 1511.42,2559.06 ; P7.17@1476.38,2544.54 ccw(c1476.38,2594.1) 1511.42,2559.06 ; P7.17@1476.38,2544.54 ccw(c1476.38,2594.1) 1511.42,2559.06 ; P7.17@1476.38,2550.54 ccw(c1476.38,2614.59) 1521.66,2569.3 ; P7.17@1476.38,2550.54 ccw(c1476.38,2614.59) 1521.66,2569.3 ; P7.17@1476.38,2550.54 ccw(c1476.38,2614.59) 1521.66,2569.3 ; P7.17@1476.64,2520.55 ccw(c1474.56,2548.36) 1501.49,2541.14 ; P7.17@1476.64,2520.55 ccw(c1474.56,2548.36) 1501.49,2541.14 ; P7.17@1476.64,2520.55 ccw(c1474.56,2548.36) 1501.49,2541.14 ; P7.17@1477.07,2520.61 ccw(c1468.34,2563.28) 1510.41,2552.01 ; P7.17@1477.07,2520.61 ccw(c1468.34,2563.28) 1510.41,2552.01 ; P7.17@1477.07,2520.61 ccw(c1468.34,2563.28) 1510.41,2552.01 ; P7.17@1478.28,2514.74 ccw(c1470.52,2552.65) 1507.89,2542.63 ; P7.17@1478.28,2514.74 ccw(c1470.52,2552.65) 1507.89,2542.63 ; P7.17@1478.28,2514.74 ccw(c1470.52,2552.65) 1507.89,2542.63 ; P7.17@1478.9,2523.83 cw(c1509.65,2521.53) 1501.67,2551.32 ; P7.17@1478.9,2523.83 cw(c1509.65,2521.53) 1501.67,2551.32 ; P7.17@1478.9,2523.83 cw(c1509.65,2521.53) 1501.67,2551.32 ; P7.17@1479.48,2508.86 ccw(c1472.69,2542.01) 1505.38,2533.25 ; P7.17@1479.48,2508.86 ccw(c1472.69,2542.01) 1505.38,2533.25 ; P7.17@1479.48,2508.86 ccw(c1472.69,2542.01) 1505.38,2533.25 ; P7.17@1490.91,2524.02 cw(c1525.98,2524.02) 1501.18,2548.82 ; P7.17@1490.91,2524.02 cw(c1525.98,2524.02) 1501.18,2548.82 ; P7.17@1490.91,2524.02 cw(c1525.98,2524.02) 1501.18,2548.82 ; P7.17@1496.91,2524.02 cw(c1546.46,2524.02) 1511.42,2559.06 ; P7.17@1496.91,2524.02 cw(c1546.46,2524.02) 1511.42,2559.06 ; P7.17@1496.91,2524.02 cw(c1546.46,2524.02) 1511.42,2559.06 ; P7.17@1502.91,2524.02 cw(c1566.95,2524.02) 1521.66,2569.3 ; P7.17@1502.91,2524.02 cw(c1566.95,2524.02) 1521.66,2569.3 ; P7.17@1502.91,2524.02 cw(c1566.95,2524.02) 1521.66,2569.3 ; 2553.35,2343.31 cw(c2548.39,2338.35) U5.88@2555.4,2338.35 ; 2553.35,2343.31 ccw(c2558.31,2348.27) U5.88@2558.31,2341.25 ; 2553.35,2343.31 ccw(c2558.31,2348.27) U5.88@2558.31,2341.25 ; 2553.35,2343.31 cw(c2548.39,2338.35) U5.88@2555.4,2338.35 ; 2553.35,2343.31 ccw(c2558.31,2348.27) U5.88@2558.31,2341.25 ; 2553.35,2343.31 cw(c2548.39,2338.35) U5.88@2555.4,2338.35
PD8: P6.19 U5.55 | length 1490.2
  Top Layer w6: U5.55@3110.91,2206.11 3418.18,2513.39 P6.19@3740.16,2513.39 ; U5.55@3131.79,2229.9 ccw(c3131.79,2236.91) 3136.75,2231.95 ; U5.55@3131.79,2229.9 ccw(c3131.79,2236.91) 3136.75,2231.95 ; U5.55@3131.79,2229.9 ccw(c3131.79,2236.91) 3136.75,2231.95 ; U5.55@3134.69,2226.99 cw(c3141.71,2226.99) 3136.75,2231.95 ; U5.55@3134.69,2226.99 cw(c3141.71,2226.99) 3136.75,2231.95 ; U5.55@3134.69,2226.99 cw(c3141.71,2226.99) 3136.75,2231.95 ; 3676.11,2513.39 cw(c3676.11,2449.34) P6.19@3721.4,2494.63 ; 3676.11,2513.39 ccw(c3676.11,2577.43) P6.19@3721.4,2532.14 ; 3676.11,2513.39 ccw(c3676.11,2577.43) P6.19@3721.4,2532.14 ; 3676.11,2513.39 cw(c3676.11,2449.34) P6.19@3721.4,2494.63 ; 3676.11,2513.39 ccw(c3676.11,2577.43) P6.19@3721.4,2532.14 ; 3676.11,2513.39 cw(c3676.11,2449.34) P6.19@3721.4,2494.63 ; 3690.6,2513.39 cw(c3690.6,2463.83) P6.19@3725.64,2498.87 ; 3690.6,2513.39 ccw(c3690.6,2562.94) P6.19@3725.64,2527.9 ; 3690.6,2513.39 ccw(c3690.6,2562.94) P6.19@3725.64,2527.9 ; 3690.6,2513.39 cw(c3690.6,2463.83) P6.19@3725.64,2498.87 ; 3690.6,2513.39 ccw(c3690.6,2562.94) P6.19@3725.64,2527.9 ; 3690.6,2513.39 cw(c3690.6,2463.83) P6.19@3725.64,2498.87 ; 3705.09,2513.39 cw(c3705.09,2478.31) P6.19@3729.89,2503.11 ; 3705.09,2513.39 ccw(c3705.09,2548.46) P6.19@3729.89,2523.66 ; 3705.09,2513.39 ccw(c3705.09,2548.46) P6.19@3729.89,2523.66 ; 3705.09,2513.39 cw(c3705.09,2478.31) P6.19@3729.89,2503.11 ; 3705.09,2513.39 ccw(c3705.09,2548.46) P6.19@3729.89,2523.66 ; 3705.09,2513.39 cw(c3705.09,2478.31) P6.19@3729.89,2503.11
PD9: P6.20 U5.56 | length 2703
  Top Layer w6: U5.56@3096.99,2220.03 3437.98,2561.02 3785.43,2561.02 ; P6.20@3836.61,2509.84 3785.43,2561.02 ; U5.56@3117.87,2243.82 ccw(c3117.87,2250.83) 3122.83,2245.87 ; U5.56@3117.87,2243.82 ccw(c3117.87,2250.83) 3122.83,2245.87 ; U5.56@3117.87,2243.82 ccw(c3117.87,2250.83) 3122.83,2245.87 ; U5.56@3120.77,2240.91 cw(c3127.79,2240.91) 3122.83,2245.87 ; U5.56@3120.77,2240.91 cw(c3127.79,2240.91) 3122.83,2245.87 ; U5.56@3120.77,2240.91 cw(c3127.79,2240.91) 3122.83,2245.87 ; 3785.44,2561.02 ccw(c3836.55,2612.14) P6.20@3839.19,2539.9 ; 3785.44,2561.02 ccw(c3836.55,2612.14) P6.20@3839.19,2539.9 ; 3785.44,2561.02 ccw(c3836.55,2612.14) P6.20@3839.19,2539.9 ; 3795.17,2551.29 ccw(c3837.24,2593.35) P6.20@3839.41,2533.9 ; 3795.17,2551.29 ccw(c3837.24,2593.35) P6.20@3839.41,2533.9 ; 3795.17,2551.29 ccw(c3837.24,2593.35) P6.20@3839.41,2533.9 ; 3799.88,2546.57 cw(c3766.7,2513.39) P6.20@3813.63,2513.39 ; 3799.88,2546.57 cw(c3766.7,2513.39) P6.20@3813.63,2513.39 ; 3799.88,2546.57 cw(c3766.7,2513.39) P6.20@3813.63,2513.39 ; 3804.91,2541.55 ccw(c3837.92,2574.57) P6.20@3839.63,2527.9 ; 3804.91,2541.55 ccw(c3837.92,2574.57) P6.20@3839.63,2527.9 ; 3804.91,2541.55 ccw(c3837.92,2574.57) P6.20@3839.63,2527.9 ; 3805.62,2547.59 cw(c3793.77,2495.88) P6.20@3843.41,2514.61 ; 3805.62,2547.59 cw(c3793.77,2495.88) P6.20@3843.41,2514.61 ; 3805.62,2547.59 cw(c3793.77,2495.88) P6.20@3843.41,2514.61 ; 3807.1,2537.75 ccw(c3843.6,2547.53) P6.20@3839.81,2509.93 ; 3807.1,2537.75 ccw(c3843.6,2547.53) P6.20@3839.81,2509.93 ; 3807.1,2537.75 ccw(c3843.6,2547.53) P6.20@3839.81,2509.93 ; 3808.35,2541.02 cw(c3799.51,2502.46) P6.20@3837.72,2512.73 ; 3808.35,2541.02 cw(c3799.51,2502.46) P6.20@3837.72,2512.73 ; 3808.35,2541.02 cw(c3799.51,2502.46) P6.20@3837.72,2512.73 ; 3809.35,2529.35 ccw(c3842.67,2538.28) P6.20@3839.21,2503.96 ; 3809.35,2529.35 ccw(c3842.67,2538.28) P6.20@3839.21,2503.96 ; 3809.35,2529.35 ccw(c3842.67,2538.28) P6.20@3839.21,2503.96 ; 3810.13,2536.33 cw(c3787.18,2513.39) P6.20@3819.63,2513.39 ; 3810.13,2536.33 cw(c3787.18,2513.39) P6.20@3819.63,2513.39 ; 3810.13,2536.33 cw(c3787.18,2513.39) P6.20@3819.63,2513.39 ; 3811.6,2520.96 ccw(c3841.74,2529.03) P6.20@3838.6,2497.99 ; 3811.6,2520.96 ccw(c3841.74,2529.03) P6.20@3838.6,2497.99 ; 3811.6,2520.96 ccw(c3841.74,2529.03) P6.20@3838.6,2497.99 ; 3813.89,2533.8 ccw(c3817.49,2549.53) P6.20@3826.06,2535.86 ; 3813.89,2533.8 ccw(c3817.49,2549.53) P6.20@3826.06,2535.86 ; 3813.89,2533.8 ccw(c3817.49,2549.53) P6.20@3826.06,2535.86 ; 3814.64,2531.81 ccw(c3838.61,2555.78) P6.20@3839.85,2521.91 ; 3814.64,2531.81 ccw(c3838.61,2555.78) P6.20@3839.85,2521.91 ; 3814.64,2531.81 ccw(c3838.61,2555.78) P6.20@3839.85,2521.91 ; 3816.53,2545.09 cw(c3806.33,2500.62) P6.20@3849.02,2516.73 ; 3816.53,2545.09 cw(c3806.33,2500.62) P6.20@3849.02,2516.73 ; 3816.53,2545.09 cw(c3806.33,2500.62) P6.20@3849.02,2516.73 ; 3818.08,2538.79 cw(c3810.42,2505.39) P6.20@3843.51,2514.29 ; 3818.08,2538.79 cw(c3810.42,2505.39) P6.20@3843.51,2514.29 ; 3818.08,2538.79 cw(c3810.42,2505.39) P6.20@3843.51,2514.29 ; 3827.43,2542.59 cw(c3818.9,2505.36) P6.20@3854.63,2518.85 ; 3827.43,2542.59 cw(c3818.9,2505.36) P6.20@3854.63,2518.85 ; 3827.43,2542.59 cw(c3818.9,2505.36) P6.20@3854.63,2518.85
PD10: P6.17 U5.57 | length 1547.9
  Top Layer w6: U5.57@3083.07,2233.95 3462.51,2613.39 P6.17@3740.16,2613.39 ; U5.57@3103.95,2257.73 ccw(c3103.95,2264.75) 3108.91,2259.79 ; U5.57@3103.95,2257.73 ccw(c3103.95,2264.75) 3108.91,2259.79 ; U5.57@3103.95,2257.73 ccw(c3103.95,2264.75) 3108.91,2259.79 ; U5.57@3106.85,2254.83 cw(c3113.87,2254.83) 3108.91,2259.79 ; U5.57@3106.85,2254.83 cw(c3113.87,2254.83) 3108.91,2259.79 ; U5.57@3106.85,2254.83 cw(c3113.87,2254.83) 3108.91,2259.79 ; 3676.11,2613.39 cw(c3676.11,2549.34) P6.17@3721.4,2594.63 ; 3676.11,2613.39 ccw(c3676.11,2677.43) P6.17@3721.4,2632.14 ; 3676.11,2613.39 ccw(c3676.11,2677.43) P6.17@3721.4,2632.14 ; 3676.11,2613.39 cw(c3676.11,2549.34) P6.17@3721.4,2594.63 ; 3676.11,2613.39 ccw(c3676.11,2677.43) P6.17@3721.4,2632.14 ; 3676.11,2613.39 cw(c3676.11,2549.34) P6.17@3721.4,2594.63 ; 3690.6,2613.39 cw(c3690.6,2563.83) P6.17@3725.64,2598.87 ; 3690.6,2613.39 ccw(c3690.6,2662.94) P6.17@3725.64,2627.9 ; 3690.6,2613.39 ccw(c3690.6,2662.94) P6.17@3725.64,2627.9 ; 3690.6,2613.39 cw(c3690.6,2563.83) P6.17@3725.64,2598.87 ; 3690.6,2613.39 ccw(c3690.6,2662.94) P6.17@3725.64,2627.9 ; 3690.6,2613.39 cw(c3690.6,2563.83) P6.17@3725.64,2598.87 ; 3705.09,2613.39 cw(c3705.09,2578.31) P6.17@3729.89,2603.11 ; 3705.09,2613.39 ccw(c3705.09,2648.46) P6.17@3729.89,2623.66 ; 3705.09,2613.39 ccw(c3705.09,2648.46) P6.17@3729.89,2623.66 ; 3705.09,2613.39 cw(c3705.09,2578.31) P6.17@3729.89,2603.11 ; 3705.09,2613.39 ccw(c3705.09,2648.46) P6.17@3729.89,2623.66 ; 3705.09,2613.39 cw(c3705.09,2578.31) P6.17@3729.89,2603.11
PD11: P6.18 U5.58 | length 2799.2
  Top Layer w6: U5.58@3069.15,2247.87 3069.15,2248.28 3484.25,2663.39 3793.31,2663.39 ; P6.18@3841.73,2614.96 3793.31,2663.39 ; U5.58@3090.03,2271.65 ccw(c3090.03,2277.67) 3094.28,2273.42 ; U5.58@3090.03,2271.65 ccw(c3090.03,2277.67) 3094.28,2273.42 ; U5.58@3090.03,2271.65 ccw(c3090.03,2277.67) 3094.28,2273.42 ; U5.58@3092.93,2268.75 cw(c3100.95,2268.75) 3095.28,2274.42 ; U5.58@3092.93,2268.75 cw(c3100.95,2268.75) 3095.28,2274.42 ; U5.58@3092.93,2268.75 cw(c3100.95,2268.75) 3095.28,2274.42 ; 3793.31,2663.38 cw(c3744.24,2614.31) P6.18@3813.63,2613.64 ; 3793.31,2663.38 cw(c3744.24,2614.31) P6.18@3813.63,2613.64 ; 3793.31,2663.38 cw(c3744.24,2614.31) P6.18@3813.63,2613.64 ; 3800.25,2656.44 ccw(c3840.16,2696.35) P6.18@3840.16,2639.91 ; 3800.25,2656.44 ccw(c3840.16,2696.35) P6.18@3840.16,2639.91 ; 3800.25,2656.44 ccw(c3840.16,2696.35) P6.18@3840.16,2639.91 ; 3803.41,2653.28 cw(c3764.26,2614.12) P6.18@3819.63,2613.58 ; 3803.41,2653.28 cw(c3764.26,2614.12) P6.18@3819.63,2613.58 ; 3803.41,2653.28 cw(c3764.26,2614.12) P6.18@3819.63,2613.58 ; 3805.89,2643.69 ccw(c3851.37,2655.41) P6.18@3839.26,2610.03 ; 3805.89,2643.69 ccw(c3851.37,2655.41) P6.18@3839.26,2610.03 ; 3805.89,2643.69 ccw(c3851.37,2655.41) P6.18@3839.26,2610.03 ; 3808.45,2633.75 ccw(c3848.33,2644.02) P6.18@3837.72,2604.23 ; 3808.45,2633.75 ccw(c3848.33,2644.02) P6.18@3837.72,2604.23 ; 3808.45,2633.75 ccw(c3848.33,2644.02) P6.18@3837.72,2604.23 ; 3810.49,2646.2 ccw(c3840.16,2675.87) P6.18@3840.16,2633.91 ; 3810.49,2646.2 ccw(c3840.16,2675.87) P6.18@3840.16,2633.91 ; 3810.49,2646.2 ccw(c3840.16,2675.87) P6.18@3840.16,2633.91 ; 3811.01,2623.81 ccw(c3845.3,2632.64) P6.18@3836.17,2598.44 ; 3811.01,2623.81 ccw(c3845.3,2632.64) P6.18@3836.17,2598.44 ; 3811.01,2623.81 ccw(c3845.3,2632.64) P6.18@3836.17,2598.44 ; 3812.55,2641.09 ccw(c3845.54,2649.59) P6.18@3840.53,2615.89 ; 3812.55,2641.09 ccw(c3845.54,2649.59) P6.18@3840.53,2615.89 ; 3812.55,2641.09 ccw(c3845.54,2649.59) P6.18@3840.53,2615.89 ; 3813.52,2643.18 cw(c3784.27,2613.93) P6.18@3825.63,2613.53 ; 3813.52,2643.18 cw(c3784.27,2613.93) P6.18@3825.63,2613.53 ; 3813.52,2643.18 cw(c3784.27,2613.93) P6.18@3825.63,2613.53 ; 3813.78,2646.98 cw(c3803.19,2607.46) P6.18@3843.59,2613.93 ; 3813.78,2646.98 cw(c3803.19,2607.46) P6.18@3843.59,2613.93 ; 3813.78,2646.98 cw(c3803.19,2607.46) P6.18@3843.59,2613.93 ; 3814.8,2632.33 ccw(c3844.1,2639.87) P6.18@3839.65,2609.95 ; 3814.8,2632.33 ccw(c3844.1,2639.87) P6.18@3839.65,2609.95 ; 3814.8,2632.33 ccw(c3844.1,2639.87) P6.18@3839.65,2609.95 ; 3816.7,2640.2 cw(c3809.39,2612.92) P6.18@3837.63,2613.35 ; 3816.7,2640.2 cw(c3809.39,2612.92) P6.18@3837.63,2613.35 ; 3816.7,2640.2 cw(c3809.39,2612.92) P6.18@3837.63,2613.35 ; 3820.73,2635.96 ccw(c3840.16,2655.38) P6.18@3840.16,2627.91 ; 3820.73,2635.96 ccw(c3840.16,2655.38) P6.18@3840.16,2627.91 ; 3820.73,2635.96 ccw(c3840.16,2655.38) P6.18@3840.16,2627.91 ; 3822.72,2644.59 cw(c3813.2,2609.07) P6.18@3849.51,2614.88 ; 3822.72,2644.59 cw(c3813.2,2609.07) P6.18@3849.51,2614.88 ; 3822.72,2644.59 cw(c3813.2,2609.07) P6.18@3849.51,2614.88 ; 3831.66,2642.19 cw(c3823.22,2610.67) P6.18@3855.44,2615.83 ; 3831.66,2642.19 cw(c3823.22,2610.67) P6.18@3855.44,2615.83 ; 3831.66,2642.19 cw(c3823.22,2610.67) P6.18@3855.44,2615.83
PD12: P6.15 U5.59 | length 1605.6
  Top Layer w6: U5.59@3055.23,2261.79 3506.83,2713.39 P6.15@3740.16,2713.39 ; U5.59@3076.11,2285.57 ccw(c3076.11,2292.59) 3081.07,2287.63 ; U5.59@3076.11,2285.57 ccw(c3076.11,2292.59) 3081.07,2287.63 ; U5.59@3076.11,2285.57 ccw(c3076.11,2292.59) 3081.07,2287.63 ; U5.59@3079.02,2282.67 cw(c3086.03,2282.67) 3081.07,2287.63 ; U5.59@3079.02,2282.67 cw(c3086.03,2282.67) 3081.07,2287.63 ; U5.59@3079.02,2282.67 cw(c3086.03,2282.67) 3081.07,2287.63 ; 3676.11,2713.39 cw(c3676.11,2649.34) P6.15@3721.4,2694.63 ; 3676.11,2713.39 ccw(c3676.11,2777.43) P6.15@3721.4,2732.14 ; 3676.11,2713.39 ccw(c3676.11,2777.43) P6.15@3721.4,2732.14 ; 3676.11,2713.39 cw(c3676.11,2649.34) P6.15@3721.4,2694.63 ; 3676.11,2713.39 ccw(c3676.11,2777.43) P6.15@3721.4,2732.14 ; 3676.11,2713.39 cw(c3676.11,2649.34) P6.15@3721.4,2694.63 ; 3690.6,2713.39 cw(c3690.6,2663.83) P6.15@3725.64,2698.87 ; 3690.6,2713.39 ccw(c3690.6,2762.94) P6.15@3725.64,2727.9 ; 3690.6,2713.39 ccw(c3690.6,2762.94) P6.15@3725.64,2727.9 ; 3690.6,2713.39 cw(c3690.6,2663.83) P6.15@3725.64,2698.87 ; 3690.6,2713.39 ccw(c3690.6,2762.94) P6.15@3725.64,2727.9 ; 3690.6,2713.39 cw(c3690.6,2663.83) P6.15@3725.64,2698.87 ; 3705.09,2713.39 cw(c3705.09,2678.31) P6.15@3729.89,2703.11 ; 3705.09,2713.39 ccw(c3705.09,2748.46) P6.15@3729.89,2723.66 ; 3705.09,2713.39 ccw(c3705.09,2748.46) P6.15@3729.89,2723.66 ; 3705.09,2713.39 cw(c3705.09,2678.31) P6.15@3729.89,2703.11 ; 3705.09,2713.39 ccw(c3705.09,2748.46) P6.15@3729.89,2723.66 ; 3705.09,2713.39 cw(c3705.09,2678.31) P6.15@3729.89,2703.11